# Altium PCB STM32CC.PcbDoc
Units mil, origin at the board's own origin, x right, y up, seen from the top; angles counter-clockwise.
Board outline 6000 x 4000 mil, 2 copper layers (Top Layer, Bottom Layer); 61 components, 52 nets, 208 pads, 4 vias.
Unrouted connection lines stored in the file: 67.
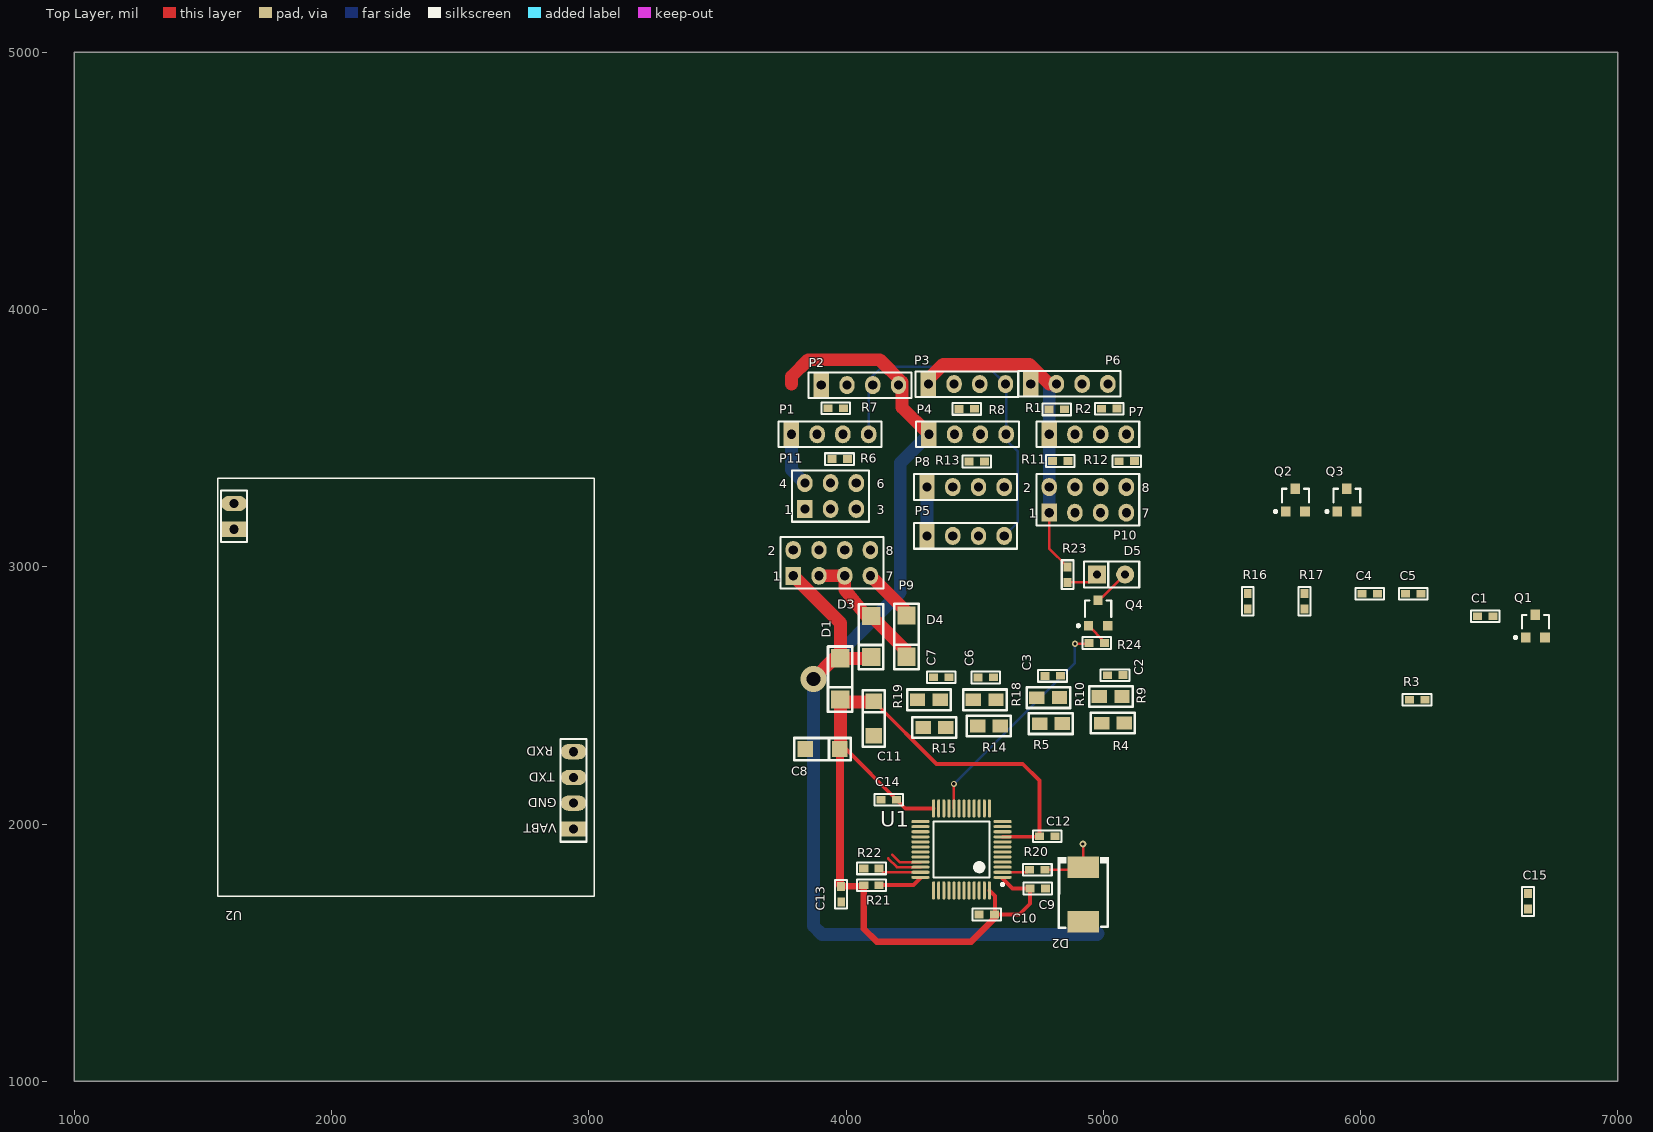
[diagram p0: Top Layer view]
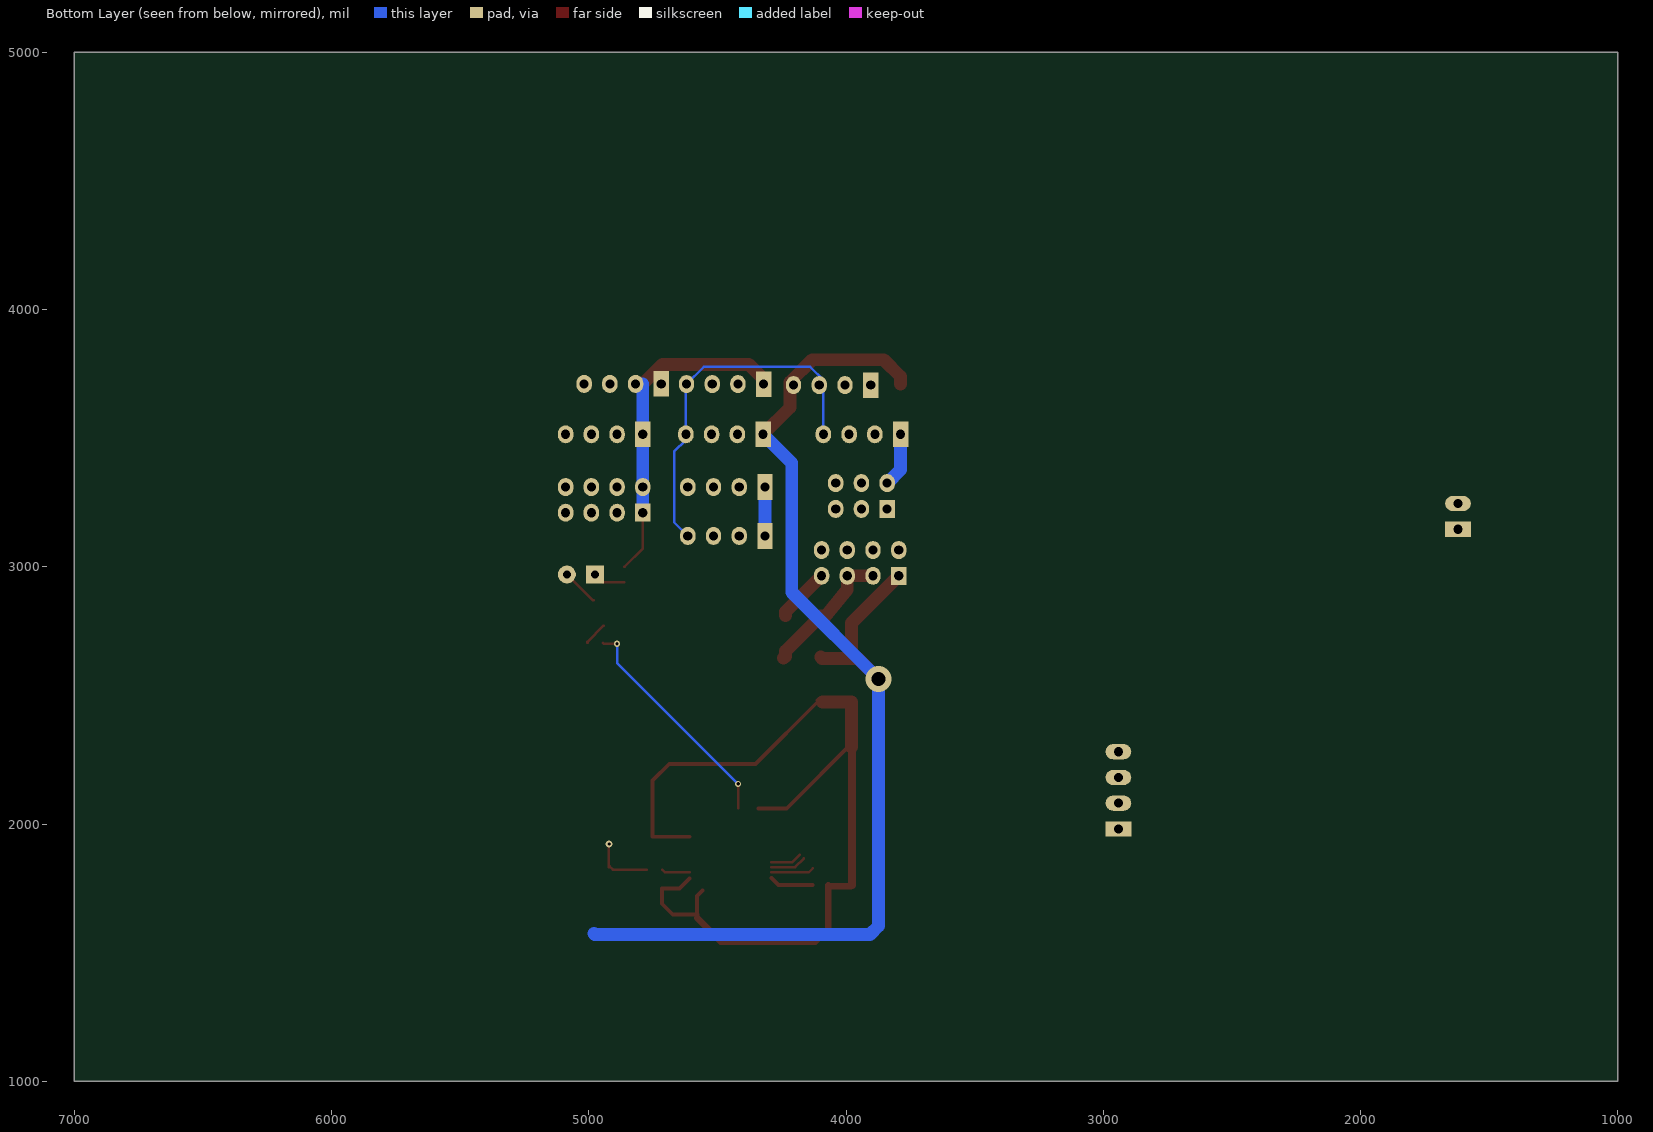
[diagram p1: Bottom Layer view, seen from below]

## Layer stack, top to bottom
Top Solder: solder mask 0.4, Solder Resist, Dk 3.5
Top Layer: signal copper 1.4
Dielectric 1: dielectric 12.6, FR-4, Dk 4.8
Bottom Layer: signal copper 1.4
Bottom Solder: solder mask 0.4, Solder Resist, Dk 3.5

## Board outline
1000,1000 7000,1000 7000,5000 1000,5000

## Design rules (kind name [scope] priority, off if disabled: settings)
Clearance Clearance_1 [InComponent('U1')] p1: gap=0
Clearance [All] p2: gap=12
PolygonConnect [All] p1: connectstyle=Relief reliefconductorwidth=10 reliefentries=4 polygonreliefangle="90 Angle" airgapwidth=10
RoutingVias [All] p1: holewidth=28 width=50 viastyle="Through Hole" minholewidth=28 minwidth=50 maxholewidth=28 maxwidth=50
SolderMaskExpansion [All] p1: expansion=4
Width [All] p1: maxlimit=100 minlimit=10 preferedwidth=10
30 further rules are at their usual default settings.

## Components (designator, comment, footprint, x,y, rotation, side; value= is the part's Value field where it differs from the comment)
C1 "Cap" 0603 6475,2809 r0 top
C2 "C_0.1uF" 0603 5036,2580 r0 top
C3 "C_0.1uF" 0603 4793,2577 r0 top
C4 "Cap" 0603 6026,2896 r0 top
C5 "Cap" 0603 6196,2896 r0 top
C6 "C_0.1uF" 0603 4534,2571 r0 top
C7 "C_0.1uF" 0603 4361,2572 r0 top
C8 "4.7uF" 1206 3909,2291 r180 top
C9 "100nF" 0603 4755,1748 r180 top
C10 "100nF" 0603 4557,1647 r180 top
C11 "1uF" 1206 4108,2410 r270 top
C12 "10nF" 0603 4772.34,1953.77 r0 top
C13 "100nF" 0603 3982,1737 r270 top
C14 "100nF" 0603 4176,2093 r180 top
C15 "0.1uF" 0603 6650,1689 r90 top
D1 "Diode" 1N4007-M7 3980,2480 r90 top
D2 "SMBJ6.8CA" DO-214AB 4923,1726 r270 top
D3 "Diode" 1N4007-M7 4100,2645 r90 top
D4 "Diode" 1N4007-M7 4237,2646 r90 top
D5 "LED RED" LED-3mm 4975,2970 r0 top
P1 "Header 4" HDR1X4 3787.94,3515 r0 top
P2 "Header 4" HDR1X4 3904,3706 r0 top
P3 "Header 4" HDR1X4 4320,3710 r0 top
P4 "Header 4" HDR1X4 4322.5,3515 r0 top
P5 "Header 4" HDR1X4 4315,3120 r0 top
P6 "Header 4" HDR1X4 4718,3711 r0 top
P7 "Header 4" HDR1X4 4790,3515 r0 top
P8 "Header 4" HDR1X4 4315,3310 r0 top
P9 "Header 4X2" HDR2X4 3795,2965 r0 top
P10 "Header 4X2" HDR2X4 4790,3210 r0 top
P11 "Header 3X2A" HDR2X3_CEN 3840,3225 r0 top
Q1 "SI2302" SOT23-3 6680,2769 r0 top
Q2 "SI2302" SOT23-3 5747,3259 r0 top
Q3 "SI2302" SOT23-3 5947,3259 r0 top
Q4 "9013" SOT-23 4980,2820 r0 top
R1 "0R" 0603 4810,3613 r0 top
R2 "0R" 0603 5013,3616 r0 top
R3 "100K" 0603 6210,2484 r0 top
R4 "50R" 0805 5082,2392 r270 top
R5 "50R" 0805 4841,2390 r270 top
R6 "1K" 0603 3965,3420 r0 top
R7 "1K" 0603 3950,3617.24 r0 top
R8 "1K" 0603 4460,3615 r0 top
R9 "50R" 0805 4985,2496 r90 top
R10 "50R" 0805 4742,2491 r90 top
R11 "0R" 0603 4843,3410 r180 top
R12 "0R" 0603 5082,3412 r0 top
R13 "1K" 0603 4518,3408 r180 top
R14 "50R" 0805 4600,2381 r270 top
R15 "50R" 0805 4388,2375 r270 top
R16 "100K" 0603 5561,2856 r90 top
R17 "100K" 0603 5781,2856 r90 top
R18 "50R" 0805 4495,2483 r90 top
R19 "50R" 0805 4278,2483 r90 top
R20 "1K" 0603 4754,1821 r180 top
R21 "0" 0603 4109,1761 r180 top
R22 "0" 0603 4109,1826 r180 top
R23 "R_1K" 0603 4860,2960 r90 top
R24 "R_2.2K" 0603 4965,2705 r0 top
U1 "STM32" LQFP48_N 4449,1901 r180 top
U2 "Header 6" PCBComponent_1 3257,2645 r180 top

## Footprints (in the part's own frame and the unit in brackets; to place one, negate y for a bottom-side part, rotate by r counter-clockwise, add the part's x,y. Pads: shape width x height; smd on the part's side, far side on the other; paste and mask are expansions set on the pad)
1N4007-M7 [mm]
  rect 1.8x1.8 smd: 1(4.166,0.05) 2(0.096,0.05)
  silkscreen extent -1.12,-1.14 5.33,1.27
0603 [mil] "0603"
  rect 35x30 smd: 1(40,-1) 2(-20.23,-1.34)
  silkscreen extent -46,-24 65,21
0805 [mil]
  rect 50x60 smd: 1(0,0) 2(0.28,-88.04)
  silkscreen extent -40,-130 40,40
1206 [mm]
  rect 1.52x1.6 smd: 1(-1.71,0) 2(1.71,0)
  silkscreen extent -2.79,-1.1 2.79,1.1
DO-214AB [mm]
  rect 2.1x3.1 smd: 1(2.7,0) 2(-2.7,0)
  silkscreen extent -3.68,-2.54 3.3,2.54
HDR1X4 [mil] "Connector; Header; 4 Position"
  rect 60x100 hole 35.43: 1(0,0)
  oval 60x70 hole 35.43: 2(100,0) 3(200,0) 4(300,0)
  silkscreen extent -50,-50 350,50
HDR2X3_CEN [mil] "Connector; Header; 3x2 Position"
  rect 60x70 hole 35.43: 1(0,0)
  oval 60x70 hole 35.43: 2(100,0) 3(200,0) 4(0,100) 5(100,100) 6(200,100)
  silkscreen extent -50,-50 250,150
HDR2X4 [mil] "Connector; Header; 4x2 Position"
  rect 60x70 hole 35.43: 1(0,0)
  oval 60x70 hole 35.43: 2(0,100) 3(100,0) 4(100,100) 5(200,0) 6(200,100) 7(300,0) 8(300,100)
  silkscreen extent -50,-50 350,150
LED-3mm [mil] "Connector; Header; 5 Position"
  rect 70x70 hole 31.5: 1(0,0)
  round 70 hole 31.5: 2(110,0)
  silkscreen extent -50,-50 165,50
LQFP48_N [mm] "Thin QFP, 48-Leads, Body 7x7mm, Pitch 0.5mm, IPC Medium Density"
  oval 1.8x0.3 smd: 1(-4.05,2.75) 2(-4.05,2.25) 3(-4.05,1.75) 4(-4.05,1.25) 5(-4.05,0.75) 6(-4.05,0.25) 7(-4.05,-0.25) 8(-4.05,-0.75) 9(-4.05,-1.25) 10(-4.05,-1.75) 11(-4.05,-2.25) 12(-4.05,-2.75) 25(4.05,-2.75) 26(4.05,-2.25) 27(4.05,-1.75) 28(4.05,-1.25) 29(4.05,-0.75) 30(4.05,-0.25) 31(4.05,0.25) 32(4.05,0.75) 33(4.05,1.25) 34(4.05,1.75) 35(4.05,2.25) 36(4.05,2.75)
  oval 0.3x1.8 smd: 13(-2.75,-4.05) 14(-2.25,-4.05) 15(-1.75,-4.05) 16(-1.25,-4.05) 17(-0.75,-4.05) 18(-0.25,-4.05) 19(0.25,-4.05) 20(0.75,-4.05) 21(1.25,-4.05) 22(1.75,-4.05) 23(2.25,-4.05) 24(2.75,-4.05) 37(2.75,4.05) 38(2.25,4.05) 39(1.75,4.05) 40(1.25,4.05) 41(0.75,4.05) 42(0.25,4.05) 43(-0.25,4.05) 44(-0.75,4.05) 45(-1.25,4.05) 46(-1.75,4.05) 47(-2.25,4.05) 48(-2.75,4.05)
  silkscreen extent -4.18,-2.75 2.75,3.57, body extent -3.5,-3.5 3.5,3.5, height 1.6
PCBComponent_1 [mil]
  rect 100x59.06 hole 35.43: 1(316,664) 5(1636,-501)
  oval 100x59.06 hole 35.43: 2(316,564) 3(316,464) 4(316,364) 6(1636,-601)
  Bottom Layer lines w10: 336,464 316,464
  silkscreen extent 235,-700 1700,925
SOT23-3 [mm] "SOT-23; 3 Leads; Body 3.0 x 2.5 mm, inc. leads (LxW max)"
  rect 0.95x1 smd: 1(-0.95,-1.125) 2(0.95,-1.125) 3(0,1.125)
  silkscreen extent -2.1,-1.25 1.32,1.13
SOT-23 [mm] "SOT-23; 3 Leads; Body 3.0 x 2.6 mm, inc. leads (LxW max)"
  rect 0.9x0.95 smd: 1(-0.95,-1.25) 2(0.95,-1.25) 3(0,1.25)
  silkscreen extent -2.07,-1.37 1.3,1.25

## Part data
C1 C4 C5: "Capacitor"
C2 C3 C6 C7: library part Cap, "贴片电容 0603"
C8 C11: library part "Cap Pol1", "Polarized Capacitor (Radial)"
C9 C10 C12 C13 C14 C15: library part Cap, "Capacitor"
D1 D3 D4: "Default Diode"
D2: library part "D Zener", "Zener Diode"
D5: library part LED0, "插件 发光二极管 5mm 绿发绿光"
P1 P2 P3 P4 P5 P6 P7 P8: "Header, 4-Pin"
P9 P10: "Header, 4-Pin, Dual row"
P11: "Header, 3-Pin, Dual row"
Q1 Q2 Q3: library part MOSFET-N, "N-Channel MOSFET"
Q4: library part NPN, "贴片三极管MMBT5551 SOT-23"
R1 R2 R11 R12: library part Res2, "贴片电阻 0603"
R3 R6 R7 R8 R13 R16 R17 R20 R21 R22: library part Res2, "Resistor"
R4 R5 R9 R10 R14 R15 R18 R19: library part Res2, "贴片电阻 0805 精度0.1%"
R23 R24: library part Resistor, "Resistor"
U2: "Header, 6-Pin"

## Via types
v1: diameter 24, hole 13, Top Layer to Bottom Layer, 2 vias
v2: diameter 26, hole 13, Top Layer to Bottom Layer, 1 vias
v3: diameter 100, hole 55, Top Layer to Bottom Layer, 1 vias

## Nets (pads, with @x,y where several pads share a name; then routed paths per layer and width w, separated by ;. In a path a pad name is that pad's centre, name@x,y a point inside that pad or via, vN(x,y) a via of type N, cw(c..) or ccw(c..) an arc to the next point about the centre after c; other vN are vias at no path point)
+5V: D4.1 P9.7 | length 213
  Top Layer w50: P9.7 4235.02,2824.98 D4.1
BEM280: P3.3 R8.2
DATA1: P6.3 R1.1
DATA2: P6.4 R2.1
DATA3: P7.3 R11.1
DATA4: P7.4 R12.1
GND: C1.1 C2.2 C3.2 C4.1 C5.1 C6.2 C7.2 C8.2 C9.2 C10.1 C11.2 C12.1 C13.1 C14.1 C15.2 D2.1 P5.2 P6.2 P7.2 P9.2 P9.4 P9.6 P9.8 P11.1 Q1.2 Q2.2 Q3.2 Q4.2 R3.1 R9.1 R10.1 R16.1 R17.1 R18.1 R19.1 R22.1 R22.2 U1.8 U1.23 U1.35 U1.47 U2.2 | length 166.5
  Top Layer w10: R22.2 4144.15,1812.42 U1.35
GND1: C1.2 P1.2 P2.2 P3.2 P10.3 P10.4 Q1.3
GND2: C4.2 P4.2 Q2.3
GND3: C5.2 P8.2 Q3.3
IQS127D: P4.3 R13.2
MAX44009: P1.3 R6.2
NetC2_1: C2.1 R4.1 R9.2
NetC3_1: C3.1 R5.1 R10.2
NetC6_1: C6.1 R14.1 R18.2
NetC7_1: C7.1 R15.1 R19.2
NetD5_1: D5.1 R23.2 | length 126.2
  Top Layer w10: R23.2 4944.77,2939.77 D5.1
NetD5_2: D5.2 Q4.3 | length 146.7
  Top Layer w10: Q4.3 4984.21,2869.21 D5.2
NetQ4_1: Q4.1 R24.1 | length 92.6
  Top Layer w10: Q4.1 5005,2708.39 R24.1
NetR21_2: R21.2 U1.36 | length 171.7
  Top Layer w15: R21.2 4261.97,1762.34 U1.36@4289.55,1789.92
NRST: C15.1 P11.6 U1.7
PA0: P5.3 U1.10
PA1: Q2.1 R16.2 U1.11
PA2: U1.12 U2.4
PA3: U1.13 U2.3
PA4: R1.2 R4.2 U1.14
PA5: R2.2 R5.2 U1.15
PA6: R8.1 U1.16
PA7: R13.1 U1.17
PA9: P8.3 U1.30
PA10: P8.4 U1.31
PA12: Q3.1 R17.2 U1.33 | length 122.7
  Top Layer w10: 4179,1881 4208.21,1851.79 U1.33
PA13: P11.2 U1.34 | length 139.6
  Top Layer w10: 4164,1866 4197.9,1832.1 U1.34
PA14: P11.5 U1.37
PB0: R11.2 R14.2 U1.18
PB1: R12.2 R15.2 U1.19
PB2: R24.2 U1.20 | length 891.3
  Top Layer w10: U1.20 v1(4419.47,2156) ; v1(4890,2701) 4942.11,2701 R24.2
  Bottom Layer w10: v1(4419.47,2156) 4890,2626.53 v1(4890,2701)
PB3: P10.6 U1.39
PB4: P10.8 U1.40
PB6: R6.1 U1.42
PB7: R7.1 U1.43
PB10: P10.5 U1.21
PB11: P10.7 U1.22
PB13: Q1.1 R3.2 U1.26
PB14: U1.27 U2.5
PB15: U1.28 U2.6
PC13: R20.1 U1.2 | length 109.5
  Top Layer w10: U1.2 4704.42,1812.42 R20.1
SCK: D2.2 P1.4 P2.4 P3.4 P4.4 P5.4 R20.2 | length 1664.2
  Top Layer w10: R20.2 4906.64,1822.34 D2.2@4919,1834.7 ; v2(4921,1922) 4923,1920 D2.2
  Bottom Layer w10: P1.4 4087.94,3710 4087.94,3725.94 4139,3777 4553,3777 P3.4 4622.5,3707.5 P4.4 4622.5,3493.5 4668,3448 4668,3173 P5.4
SHT10_DIS: P2.3 R7.2
VBAT: D1.1 D3.2 P2.1 P4.1 P9.1 U2.1 | length 4643.5
  Top Layer w50: 3787.94,3710 3787.94,3739.94 3853,3805 4131,3805 4218,3718 4218,3619.5 P4.1 ; P9.1 3978.02,2781.98 D1.1 ; v3(3874,2564) 3954.02,2644.02 D1.1 ; D3.2 4093.25,2644.02 D1.1
  Bottom Layer w50: P4.1 4211,3403.5 4211,2901 v3(3874,2564) 3874,1603 3906,1571 4977,1571 4980,1574
VCC1: C8.1 C9.1 C10.2 C11.1 C12.2 C13.2 C14.2 D1.2 P1.1 P3.1 P5.1 P6.1 P7.1 P8.1 P10.1 P10.2 P11.4 R21.1 R23.1 U1.1 U1.9 U1.24 U1.48 | length 5388.6
  Top Layer w10: P10.1 4790,3071 R23.1
  Top Layer w15: C13.2@3976.32,1761.57 C13.2 ; C8.1 3999.57,2291 C14.2 4230.12,2060.45 U1.24 ; R21.1@4064.23,1757.23 R21.1 ; C11.1@4107.68,2485 C11.1@4111.68,2481 ; C11.1 4351.43,2233.89 4687,2233.89 4752.11,2168.78 C12.2 ; U1.48 4578.77,1720.05 C10.2@4578.77,1648.34 ; C10.2@4576.77,1636.66 4576.77,1644.77 4578.77,1646.77 C10.2@4578.77,1648.34 ; C10.2 C10.2@4578.77,1648.34 ; C10.2@4578.77,1634.66 C10.2@4578.77,1636.66 ; U1.1@4608.45,1787.92 4647.37,1749 C9.1 4715,1690 4673.34,1648.34 C10.2@4578.77,1648.34 ; U1.9 C12.2@4752.11,1950.21
  Top Layer w25: C13.2 R21.1@4064.23,1757.23 ; R21.1 4069,1593 4119,1543 4487.11,1543 C10.2@4578.77,1634.66
  Top Layer w30: C13.2@3976.32,1761.57 C8.1 ; P3.1 P3.1@4320,3729
  Top Layer w50: C8.1@3978.02,2298.69 3978.02,2473.79 C11.1@4091.46,2473.79 ; P3.1@4320,3729 4378,3787 4713,3787 4790,3710
  Bottom Layer w50: P1.1 3787.94,3377.06 P11.4 ; P5.1 P8.1 ; P10.1 P10.2 P7.1 4790,3710
VSUN: D3.1 D4.2 P9.3 P9.5 | length 527.1
  Top Layer w50: P9.3 P9.5 3995,2912.04 4083.02,2803.02 D3.1@4087.52,2798.52 ; D3.1 4235.02,2672.02 D4.2@4235.02,2651.02 ; D4.2@4235.02,2651.79 4235.02,2653.02 D4.2@4243.25,2644.79
pads on no net: P11.3 U1.3 U1.4 U1.5 U1.6 U1.25 U1.29 U1.32 U1.38 U1.41 U1.44 U1.45 U1.46

## Other copper
Top Layer:
  pour cut-out: 3735,2853 3848,2853 3848,2636 3837,2625 3826,2636 3733,2636 3733,2850 3735,2852
  pour cut-out: 5046,1895 5051,1890 5051,1481 5177,1481 5179,1483 5167,1495 5167,1956 5056,1956 5054,1958 5052,1956 5052,1865

## Silkscreen, mask and mechanical layers (free items; w line width, h text height)
Mechanical 1:
  lines w5: 3720,4180 3720,2455 3720,1480 5180,1480 ; 5185,1485 5185,2515 5185,3975

## Text inside footprints (layer, text, board x,y; h text height)
P9: Top Overlay "8" at 4155,3045 h36; Top Overlay "7" at 4155,2945 h36; Top Overlay "1" at 3715,2945 h36; Top Overlay "2" at 3695,3045 h36
P10: Top Overlay "8" at 5150,3290 h36; Top Overlay "7" at 5150,3190 h36; Top Overlay "1" at 4710,3190 h36; Top Overlay "2" at 4690,3290 h36
P11: Top Overlay "6" at 4120,3305 h36; Top Overlay "3" at 4120,3205 h36; Top Overlay "1" at 3760,3205 h36; Top Overlay "4" at 3740,3305 h36
U2: Top Overlay "RXD" at 2862,2300 h36 r180; Top Overlay "TXD" at 2867,2200 h36 r180; Top Overlay "GND" at 2876,2101 h36 r180; Top Overlay "VABT" at 2876,2001 h36 r180